# EAGLE board segmentring4und8klein (EAGLE 7.2.0)
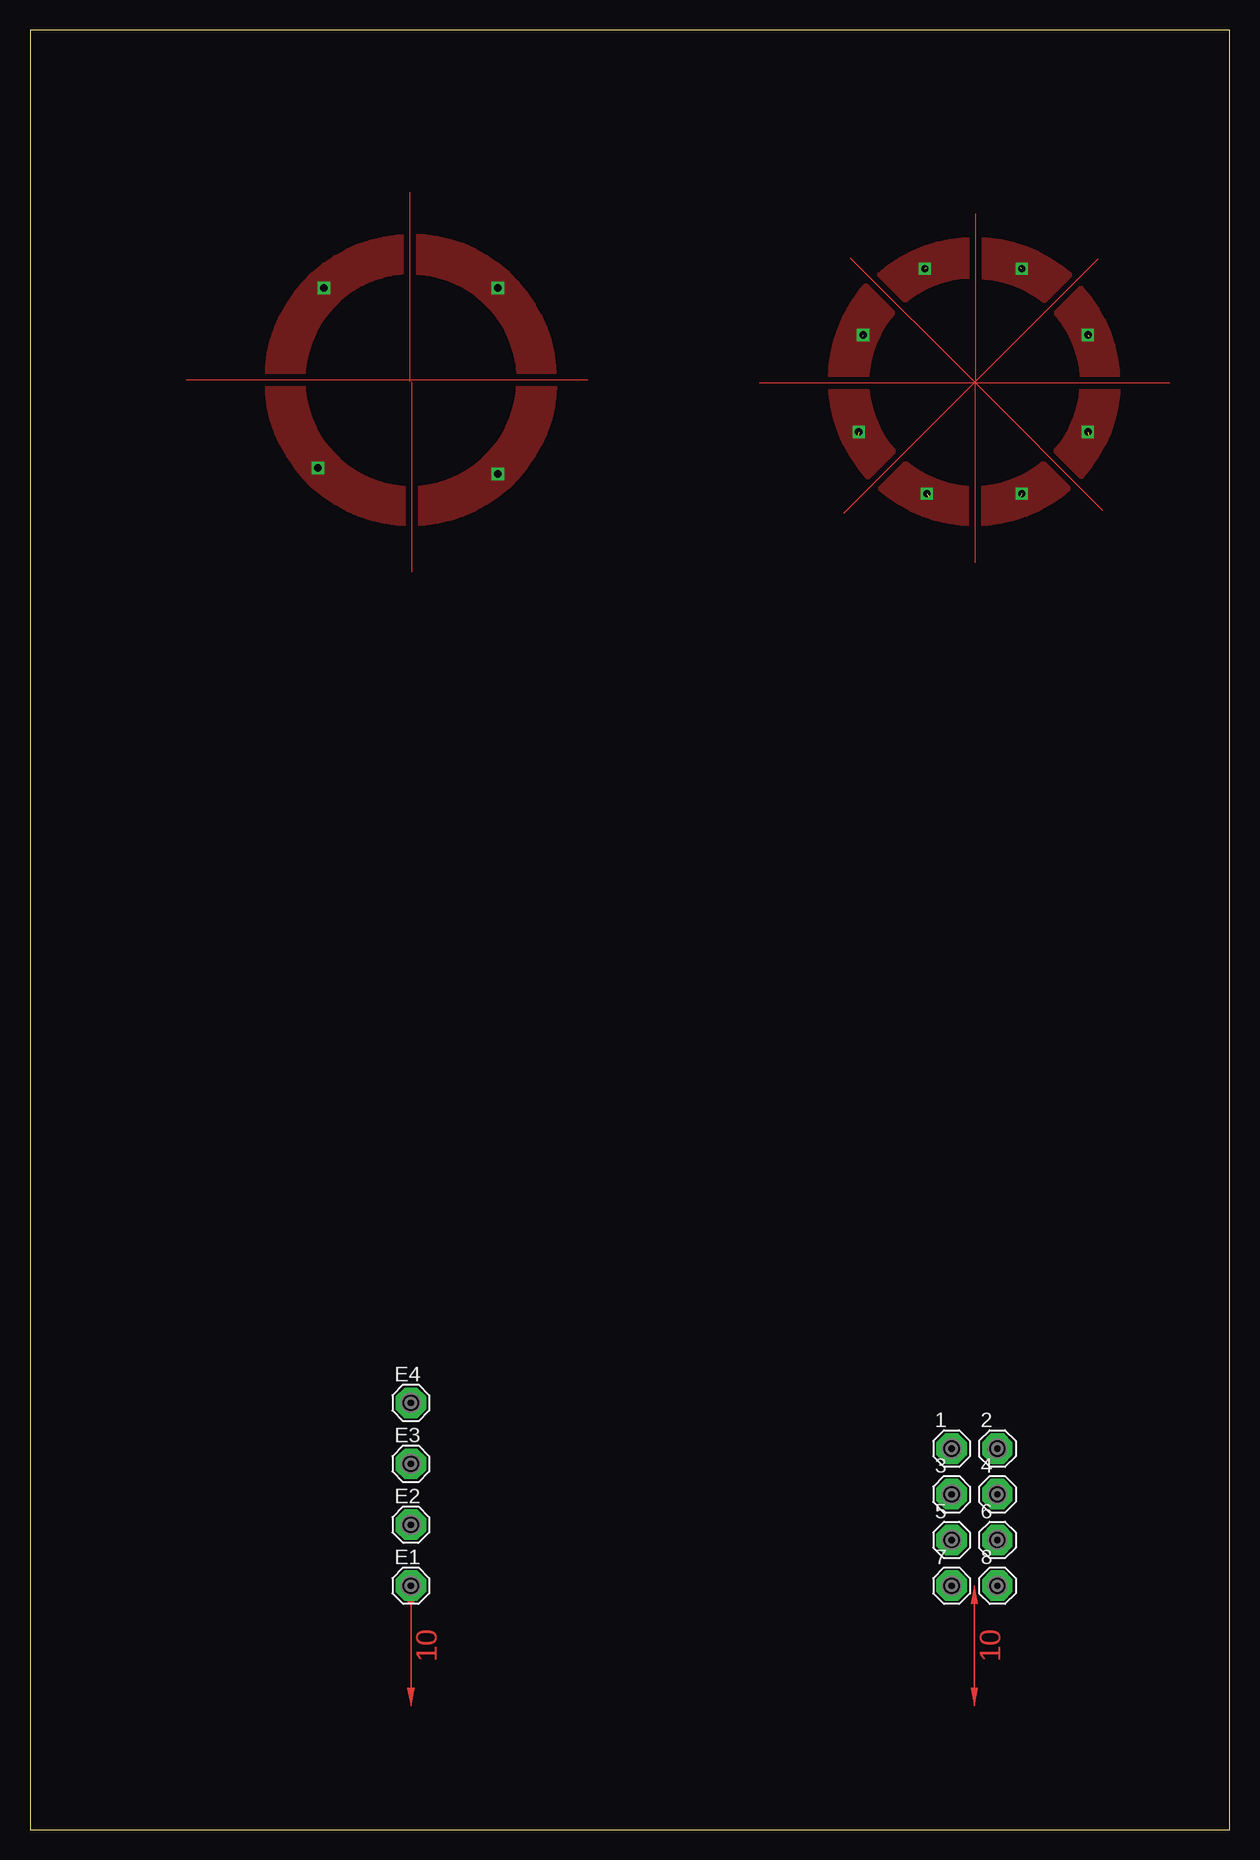
[diagram p0: board, top side]
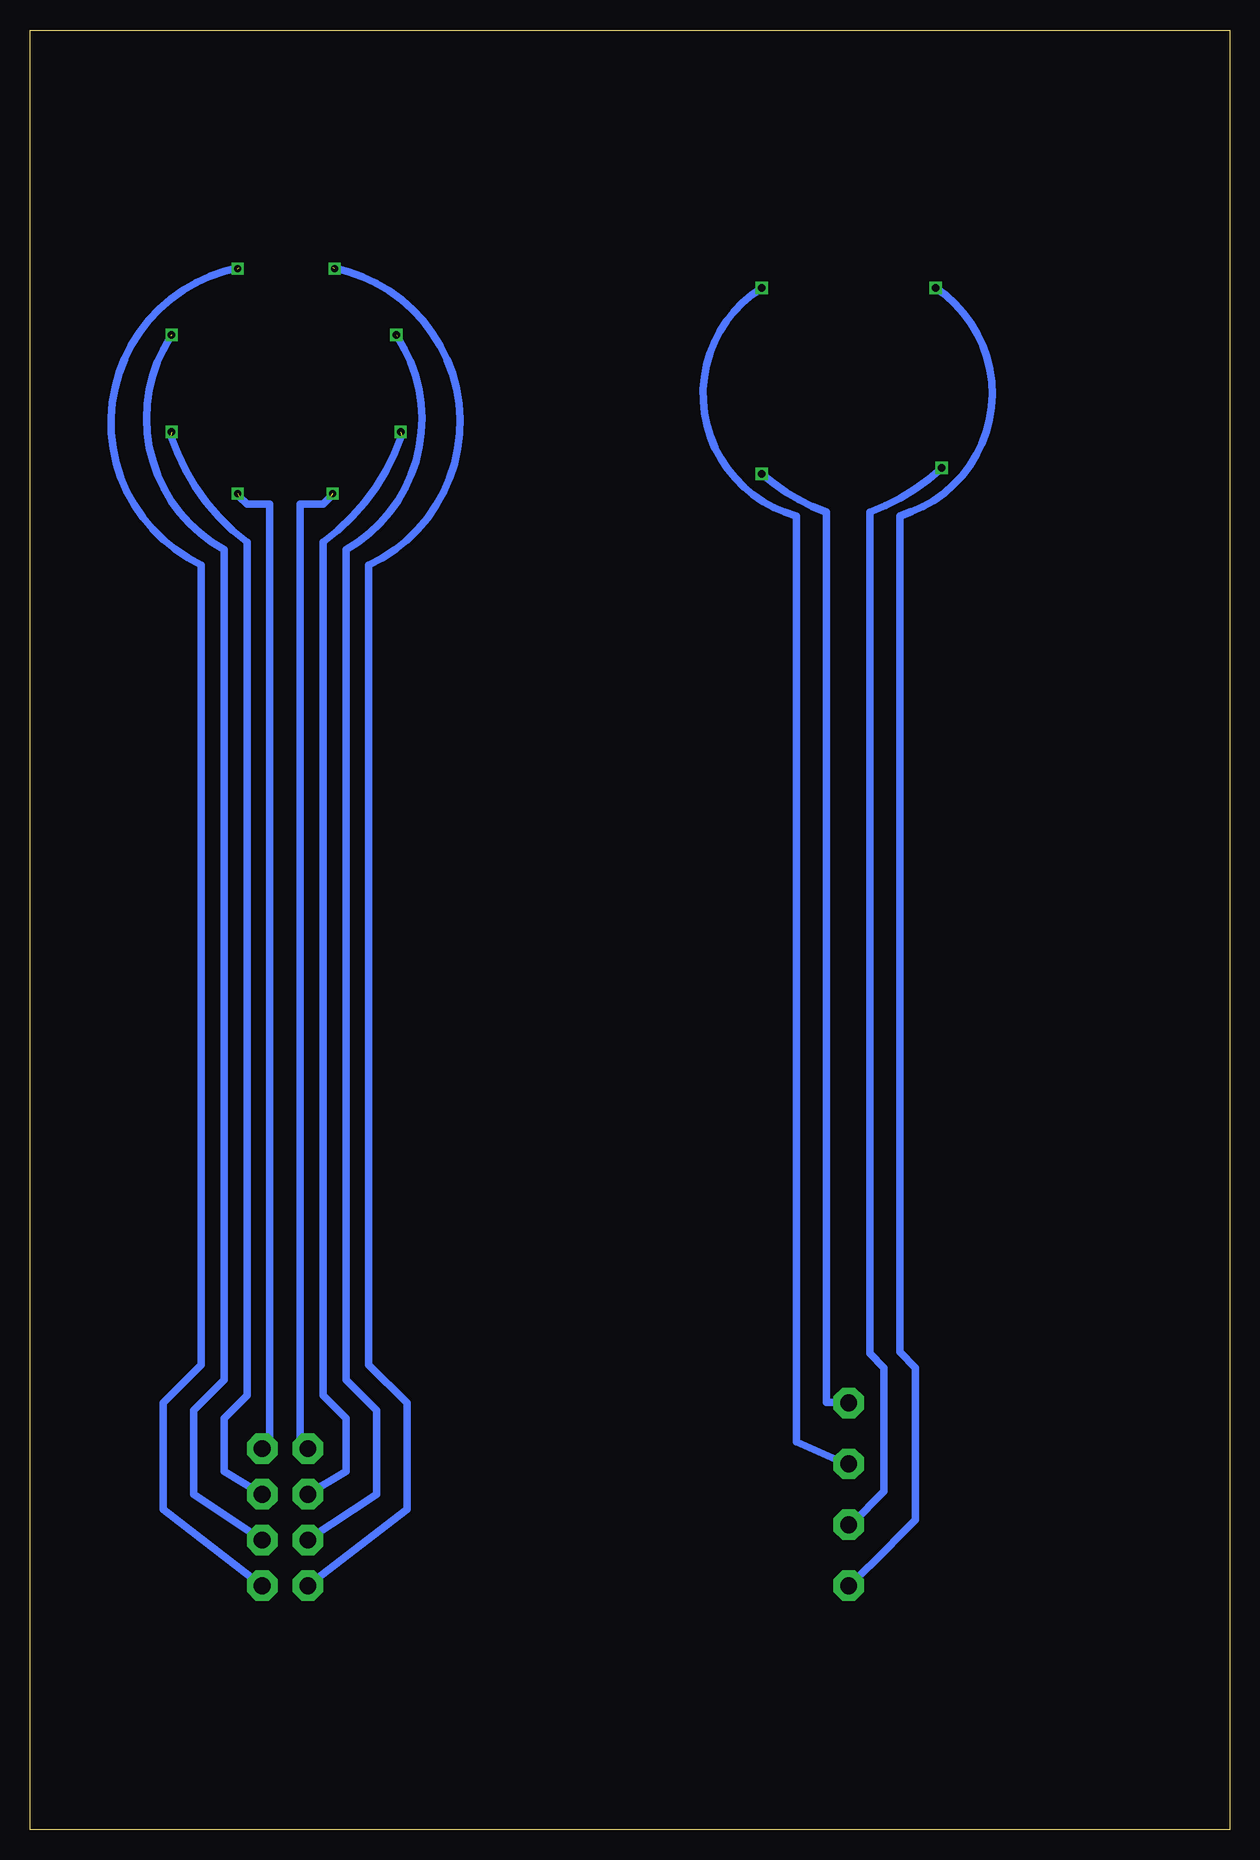
[diagram p1: board, bottom side, seen from below]

Size 100 x 150 mm. Coordinates in mm from the lower left corner, seen from the top.
Outline: 0,0 100,0 100,150 0,150 0,0
Copper layers (1*16): Top 0.035mm / dielectric 1.5mm / Bottom 0.035mm
Design rules "default": minimum track width 10mil, minimum drill 24mil, track to track 8mil, track to pad 8mil, pad to pad 8mil, via to via 8mil, smd to smd 8mil, copper to edge 40mil, drill to drill 8mil, minimum pad ring 10mil, minimum via ring 8mil, stop-mask expansion 4mil, vias tented up to drill 0mil, thermal gap 10mil

## Footprints (pad centres in the part's own frame; a part is rotated, then mirrored left to right if it is on the bottom)
SE14 = drill 1.397 pad 2.54 octagon: MP 0,0

## Placement (x,y rotation side)
1  SE14  [SE14]  76.83,31.75 0 top
2  SE14  [SE14]  80.64,31.75 0 top
3  SE14  [SE14]  76.83,27.94 0 top
4  SE14  [SE14]  80.64,27.94 0 top
5  SE14  [SE14]  76.83,24.13 0 top
6  SE14  [SE14]  80.64,24.13 0 top
7  SE14  [SE14]  76.83,20.32 0 top
8  SE14  [SE14]  80.64,20.32 0 top
E1  SE14  [SE14]  31.75,20.32 0 top
E2  SE14  [SE14]  31.75,25.4 0 top
E3  SE14  [SE14]  31.75,30.48 0 top
E4  SE14  [SE14]  31.75,35.56 0 top

## Library data of the parts
1-8 E1-E4 = solpad

## Nets
1: 1.MP
2: 2.MP
3: 3.MP
4: 4.MP
5: 5.MP
6: 6.MP
7: 7.MP
8: 8.MP
N$4: E1.MP
N$5: E2.MP
N$6: E3.MP
N$7: E4.MP

## Tracks (layer width: path | path; a pad name or v marks a point on that pad's centre or on a via)
1  (via drill 0.6)  (1 unrouted)
  Bottom 0.61: 1.MP 77.47,32.38 77.47,110.49 75.56,110.49 74.93,111.12
  other vias: 74.77,111.35
  pour Top (isolate 0.5): 69.74,120.82 arc90 78.74,111.82 78.74,108.82 arc-90 66.74,120.82
2  (via drill 0.6)  (1 unrouted)
  Bottom 0.61: 82.55,111.12 81.92,110.49 80.01,110.49 80.01,32.38 2.MP
  other vias: 82.69,111.35
  pour Top (isolate 0.5): 78.74,111.82 arc90 87.74,120.82 90.74,120.82 arc-90 78.74,108.82
3  (via drill 0.6)  (1 unrouted)
  Bottom 0.61: 3.MP 73.66,29.84 73.66,34.29 75.56,36.2 75.56,107.31 arc-35 69.02,116.2
  other vias: 69.09,116.5
  pour Top (isolate 0.5): 69.74,120.82 arc90 78.74,111.82 78.74,108.82 arc-90 66.74,120.82
4  (via drill 0.6)  (1 unrouted)
  Bottom 0.61: 88.27,116.2 arc-35 81.92,107.31 81.92,36.2 83.82,34.29 83.82,29.84 4.MP
  other vias: 88.2,116.5
  pour Top (isolate 0.5): 78.74,111.82 arc90 87.74,120.82 90.74,120.82 arc-90 78.74,108.82
5  (via drill 0.6)  (1 unrouted)
  Bottom 0.61: 69.42,124.46 arc94 73.66,106.68 73.66,37.47 71.12,34.92 71.12,27.94 5.MP
  other vias: 69.46,124.58
  pour Top (isolate 0.5): 78.84,129.42 arc90 69.74,120.82 66.74,120.82 arc-90 78.74,132.82
6  (via drill 0.6)  (1 unrouted)
  Bottom 0.61: 88.27,124.46 arc-94 83.82,106.68 83.82,37.47 86.36,34.92 86.36,27.94 6.MP
  other vias: 88.2,124.58
  pour Top (isolate 0.5): 78.74,129.45 arc-90 87.74,120.45 90.74,120.45 arc90 78.74,132.45
7  (via drill 0.6)  (1 unrouted)
  Bottom 0.61: 74.73,130.18 arc144 71.75,105.41 71.75,38.73 68.58,35.56 68.58,26.67 7.MP
  other vias: 74.6,130.09
  pour Top (isolate 0.5): 78.74,129.45 arc90 69.74,120.82 66.74,120.82 arc-90 78.84,132.55
8  (via drill 0.6)  (1 unrouted)
  Bottom 0.61: 82.55,130.18 arc-144 85.72,105.41 85.72,38.73 88.9,35.56 88.9,26.67 8.MP
  other vias: 82.69,130.09
  pour Top (isolate 0.5): 78.74,129.42 arc-90 87.74,120.82 90.74,120.82 arc90 78.74,132.52
E1  (via drill 0.6)
  Bottom 0.406: 30,22 30.1,21.9
  Bottom 0.61: v24.5,128.5 arc130 27.5,109.5 27.5,39.8 26.2,38.5 26.2,25.8 30,22 | 30.1,21.9 31.5,20.5
  pour Top (isolate 0.5): 31.75,129.82 arc90 22.75,120.82 19.75,120.82 arc-90 31.75,132.82
E2  (via drill 0.6)
  Bottom 0.61: v24,113.5 arc22 30,109.8 30,40.3 30,40.2 30,39.7 28.8,38.5 28.8,28.2 31.5,25.5
  pour Top (isolate 0.5): 22.75,120.82 arc90 31.75,111.82 31.75,108.82 arc-90 19.75,120.82
E3  (via drill 0.6)
  Bottom 0.61: v39,128.5 arc-133 36.1,109.5 36.1,32.3 32,30.5
  pour Top (isolate 0.5): 31.75,129.82 arc-90 40.75,120.82 43.75,120.82 arc90 31.75,132.82
E4  (via drill 0.6 pad 0.25)
  Bottom 0.61: v39,113 arc-21 33.6,109.8 33.6,35.6 31.8,35.6
  pour Top (isolate 0.5): 31.75,111.82 arc90 40.75,120.82 43.75,120.82 arc-90 31.75,108.82
S$1
  Top 0: 46.5,120.8 13,120.8
S$2
  Top 0: 31.8,120.7 31.8,104.8
S$3
  Top 0: 78.8,134.7 78.8,120.6 | 78.8,105.6 78.8,120.6 | 78.8,120.6 95,120.6 | 60.8,120.6 78.8,120.6 | 78.8,120.6 89.4,110 | 78.8,120.6 68.4,131
S$4
  Top 0: 89,130.9 67.8,109.7
S$5
  Top 0: 31.7,120.7 31.7,136.5
(copper drawn outside any net)
  shapes: Top area x2